# EAGLE board PCB_finale (EAGLE 9.6.2)
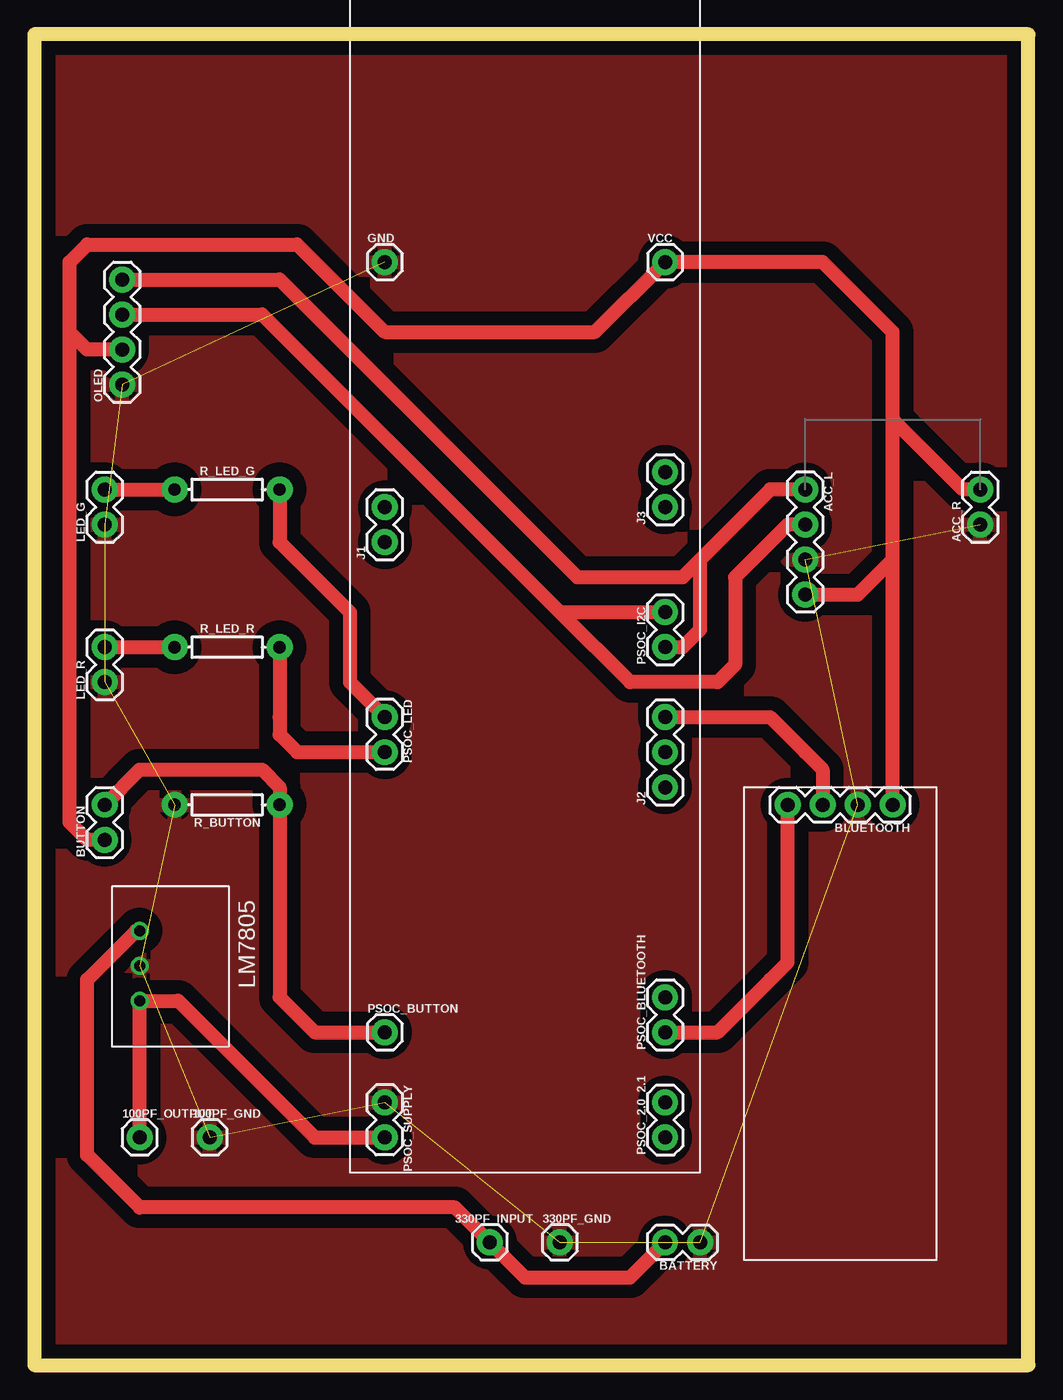
[diagram p0: board, top side]

Size 72.06 x 96.51 mm. Coordinates in mm from the lower left corner, seen from the top.
Outline: 0,0 72.06,0 72.06,96.51 0,96.51 0,0
Copper layers (1*16): Top 0.035mm / dielectric 1.5mm / Bottom 0.035mm
Design rules "default": minimum track width 6mil, minimum drill 0.35mm, track to track 6mil, track to pad 6mil, pad to pad 6mil, via to via 6mil, smd to smd 6mil, copper to edge 40mil, drill to drill 6mil, minimum pad ring 10mil, minimum via ring 8mil, stop-mask expansion 4mil, vias tented up to drill 0mil, thermal gap 10mil

## Footprints (pad centres in the part's own frame; a part is rotated, then mirrored left to right if it is on the bottom)
1X01 = drill 1.016 pad 1.88: 1 0,0
1X04 = drill 1.016 pad 1.88: 1 0,0; 2 2.54,0; 3 5.08,0; 4 7.62,0
1X02 = drill 1.016 pad 1.88: 1 0,0; 2 2.54,0
1X03 = drill 1.016 pad 1.88: 1 0,0; 2 2.54,0; 3 5.08,0
DC-DC_CONVERTER_78XX = drill 0.8: GND 0,0; VIN -2.54,0; VOUT 2.54,0
AXIAL-0.3 = drill 0.9 pad 1.88: P$1 -3.81,0; P$2 3.81,0

## Placement (x,y rotation side)
100PF_GND  [1X01]  12.7,16.51 0 top
100PF_OUTPUT  [1X01]  7.62,16.51 0 top
330PF_GND  [1X01]  38.1,8.89 0 top
330PF_INPUT  [1X01]  33.02,8.89 0 top
ACC_L  [1X04]  55.88,63.5 270 top
ACC_R  [1X02]  68.58,60.96 90 top
BATTERY  [1X02]  48.26,8.89 180 top
BLUETOOTH  [1X04]  62.23,40.64 180 top
BUTTON  [1X02]  5.08,38.1 90 top
GND  [1X01]  25.4,80.01 0 top
J1  [1X02]  25.4,59.69 90 top
J2  455-1750-1-ND  [1X03]  45.72,41.91 90 top
J3  [1X02]  45.72,62.23 90 top
LED_G  [1X02]  5.08,60.96 90 top
LED_R  [1X02]  5.08,49.53 90 top
LM7805  R-78E5.0-1.0  [DC-DC_CONVERTER_78XX]  7.62,28.96 270 top
OLED  [1X04]  6.35,71.12 90 top
PSOC_2.0_2.1  [1X02]  45.72,16.51 90 top
PSOC_BLUETOOTH  [1X02]  45.72,24.13 90 top
PSOC_BUTTON  [1X01]  25.4,24.13 0 top
PSOC_I2C  [1X02]  45.72,52.07 90 top
PSOC_LED  [1X02]  25.4,46.99 270 top
PSOC_SUPPLY  [1X02]  25.4,19.05 270 top
R_BUTTON  330  [AXIAL-0.3]  13.97,40.64 180 top
R_LED_G  330  [AXIAL-0.3]  13.97,63.5 0 top
R_LED_R  330  [AXIAL-0.3]  13.97,52.07 0 top
VCC  [1X01]  45.72,80.01 0 top

## Library data of the parts
100PF_GND 100PF_OUTPUT 330PF_GND 330PF_INPUT ACC_R BATTERY BUTTON GND J1 J3 LED_G LED_R PSOC_2.0_2.1 PSOC_BLUETOOTH PSOC_BUTTON PSOC_I2C PSOC_LED PSOC_SUPPLY VCC = SparkFun-Connectors
ACC_L BLUETOOTH OLED = SparkFun-Connectors; PROD_ID: CONN-09696
J2 = SparkFun-Connectors; PROD_ID: XXX-00000
LM7805 = SparkFun-IC-Power; PROD_ID: COM-13655
R_BUTTON R_LED_G R_LED_R = SparkFun-Resistors; PROD_ID: RES-8371

## Nets
0.7_BUTTON: BUTTON.2 PSOC_BUTTON.1 R_BUTTON.P$1
2.3_RX: BLUETOOTH.4 PSOC_BLUETOOTH.1
12.0_SCL: ACC_L.2 OLED.3 PSOC_I2C.2
12.1_SDA: ACC_L.1 OLED.4 PSOC_I2C.1
12.3_TX: BLUETOOTH.3 J2.3
15.4_LED_G: PSOC_LED.1 R_LED_G.P$2
15.5_LED_R: PSOC_LED.2 R_LED_R.P$2
GND: 100PF_GND.1 330PF_GND.1 ACC_L.3 ACC_R.1 BATTERY.1 BLUETOOTH.2 GND.1 LED_G.1 LED_R.1 LM7805.GND OLED.1 PSOC_SUPPLY.1 R_BUTTON.P$2
IN_BATTERY: 330PF_INPUT.1 BATTERY.2 LM7805.VIN
LED_G_A: LED_G.2 R_LED_G.P$1
LED_R_A: LED_R.2 R_LED_R.P$1
VCC: ACC_L.4 ACC_R.2 BLUETOOTH.1 BUTTON.1 OLED.2 VCC.1
VDD: 100PF_OUTPUT.1 LM7805.VOUT PSOC_SUPPLY.2

## Tracks (layer width: path | path; a pad name or v marks a point on that pad's centre or on a via)
0.7_BUTTON
  Top 1.016: PSOC_BUTTON.1 20.32,24.13 17.78,26.67 R_BUTTON.P$1 17.78,41.91 16.51,43.18 12.7,43.18 7.62,43.18 BUTTON.2
2.3_RX
  Top 1.016: BLUETOOTH.4 54.61,29.21 53.34,27.94 49.53,24.13 PSOC_BLUETOOTH.1
12.0_SCL
  Top 1.016: ACC_L.2 54.61,60.96 50.8,57.15 50.8,50.8 49.53,49.53 43.18,49.53 38.1,54.61 | 38.1,54.61 PSOC_I2C.2 | OLED.3 16.51,76.2 38.1,54.61
12.1_SDA
  Top 1.016: OLED.4 17.78,78.74 39.37,57.15 46.99,57.15 48.26,58.42 | 48.26,58.42 53.34,63.5 ACC_L.1 | PSOC_I2C.1 46.99,52.07 48.26,53.34 48.26,58.42
12.3_TX
  Top 1.016: BLUETOOTH.3 57.15,43.18 55.88,44.45 53.34,46.99 52.07,46.99 J2.3
15.4_LED_G
  Top 1.016: R_LED_G.P$2 17.78,59.69 22.86,54.61 22.86,49.53 PSOC_LED.1
15.5_LED_R
  Top 1.016: R_LED_R.P$2 17.78,46.99 17.78,45.72 19.05,44.45 PSOC_LED.2
GND  (12 unrouted)
  pour Top (isolate 1): 0,0 72.39,0 72.39,96.52 0,96.52
IN_BATTERY
  Top 0.254: 7.37,31.5 LM7805.VIN
  Top 1.016: 7.37,31.5 3.81,27.94 3.81,15.24 7.62,11.43 30.48,11.43 330PF_INPUT.1 35.56,6.35 43.18,6.35 BATTERY.2
LED_G_A
  Top 1.016: LED_G.2 R_LED_G.P$1
LED_R_A
  Top 1.016: LED_R.2 R_LED_R.P$1
VCC
  Top 1.016: 62.23,58.42 62.23,68.58 | 62.23,68.58 62.23,74.93 57.15,80.01 VCC.1 40.64,74.93 25.4,74.93 19.05,81.28 3.81,81.28 2.54,80.01 2.54,74.93 | 62.23,58.42 59.69,55.88 ACC_L.4 | ACC_R.2 67.31,63.5 62.23,68.58 | BUTTON.1 3.81,38.1 2.54,39.37 2.54,74.93 | OLED.2 3.81,73.66 2.54,74.93 | BLUETOOTH.1 62.23,58.42
VDD
  Top 1.016: 100PF_OUTPUT.1 LM7805.VOUT 10.41,26.42 20.32,16.51 PSOC_SUPPLY.2